# Altium PCB DSPboard.PCBDOC (part 1 of 2)
Units mil, origin at the board's own origin, x right, y up, seen from the top; angles counter-clockwise.
Board outline 6250 x 3000 mil, 4 copper layers (Top Layer, Internal Plane 1, Internal Plane 2, Bottom Layer); 133 components, 118 nets, 891 pads, 424 vias.
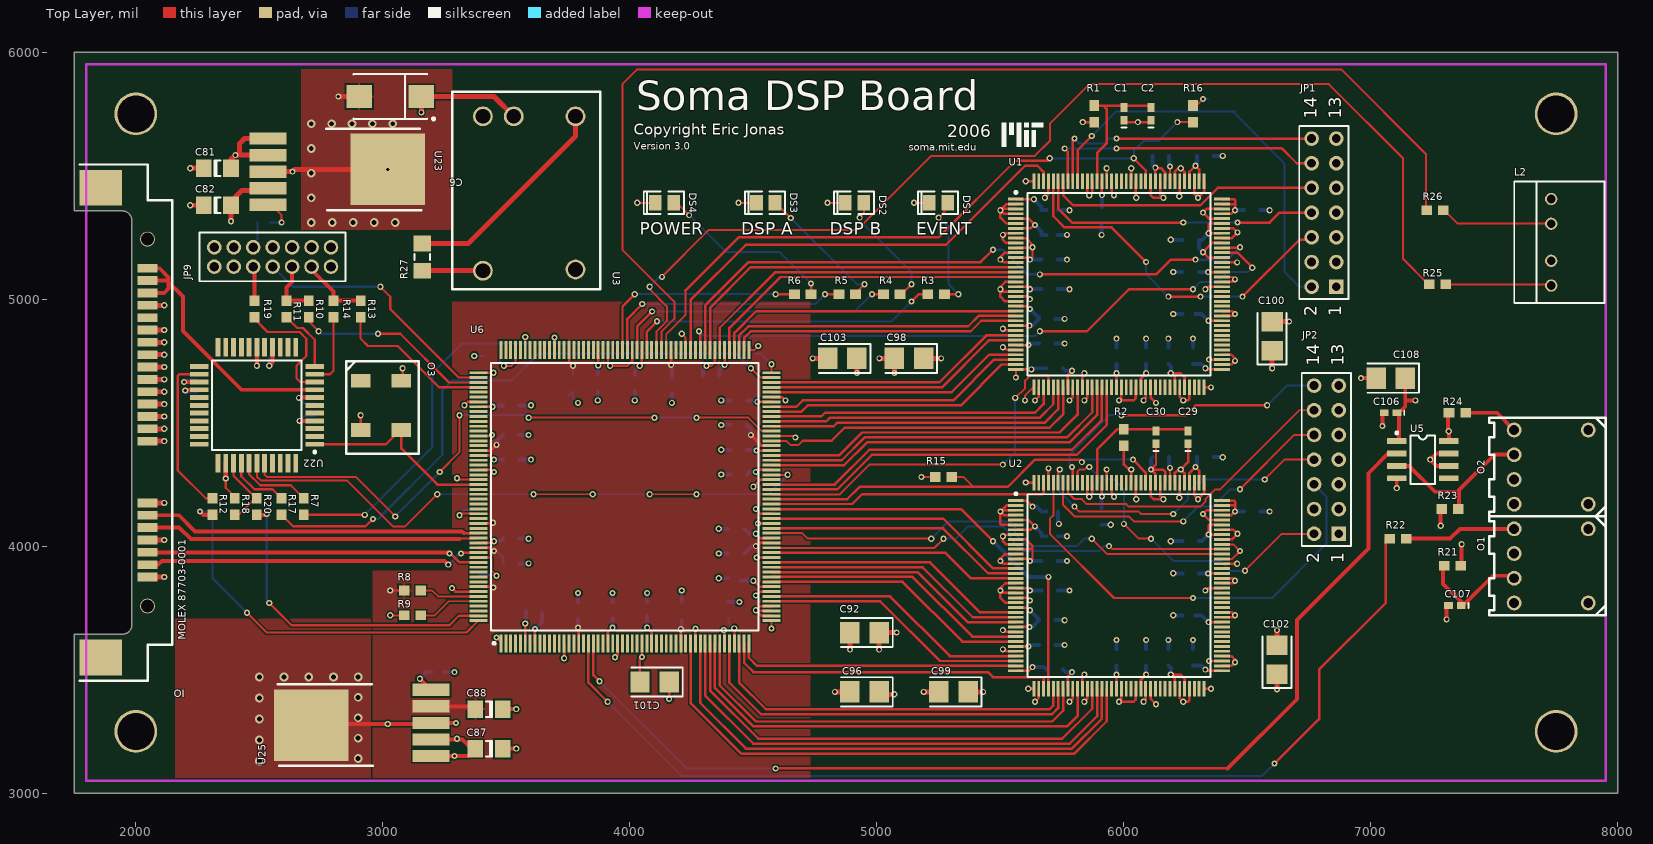
[diagram p0: Top Layer view]
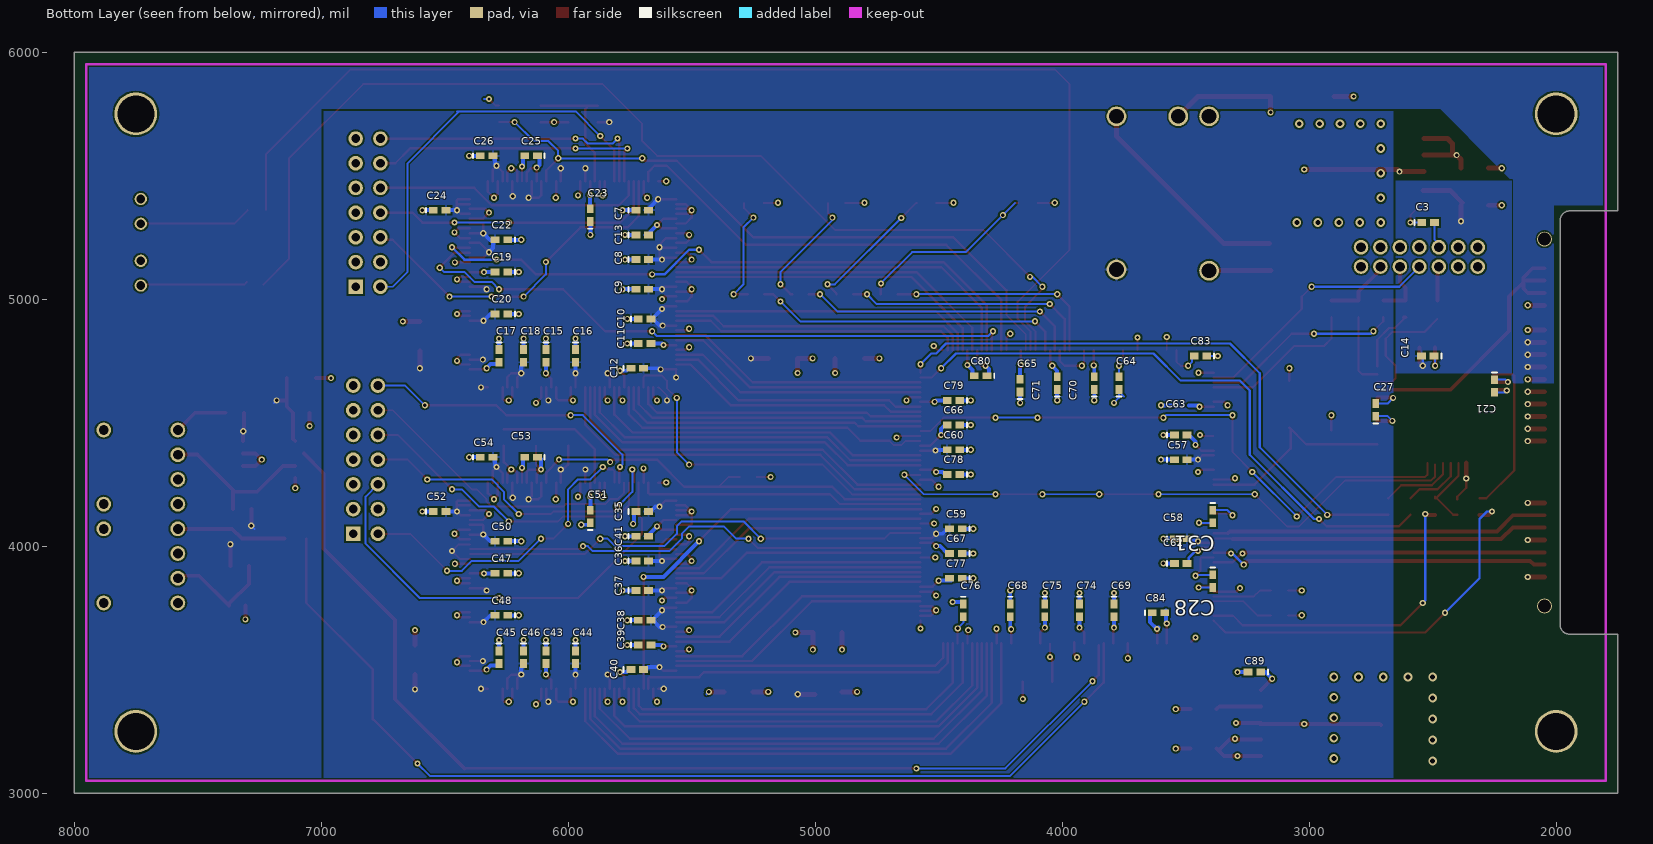
[diagram p1: Bottom Layer view, seen from below]
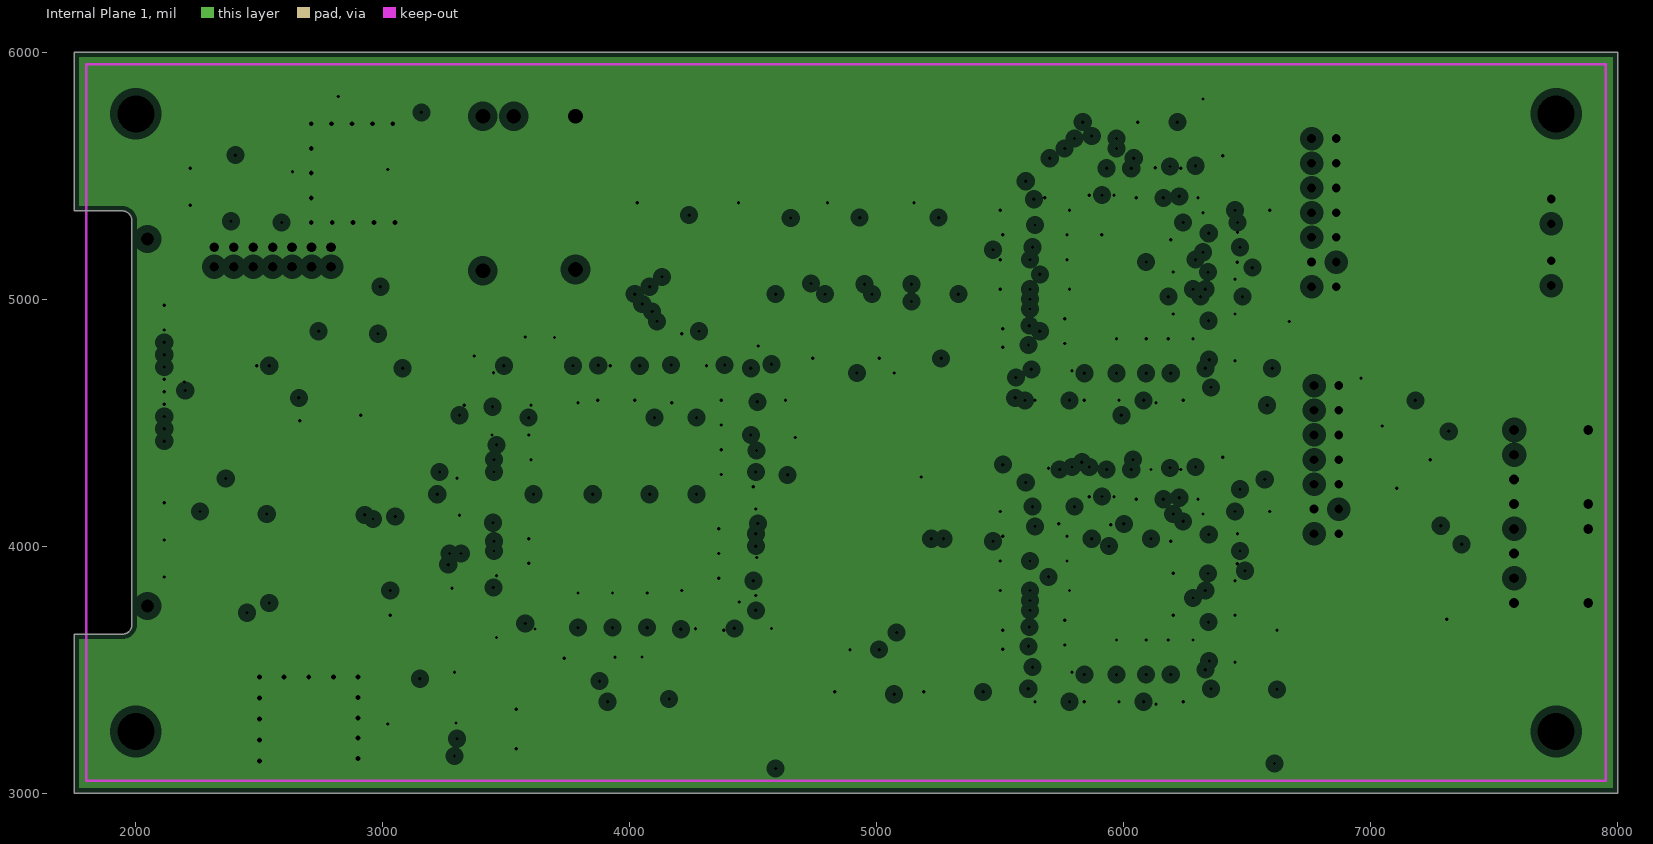
[diagram p2: Internal Plane 1, clearances drawn from the general rule]
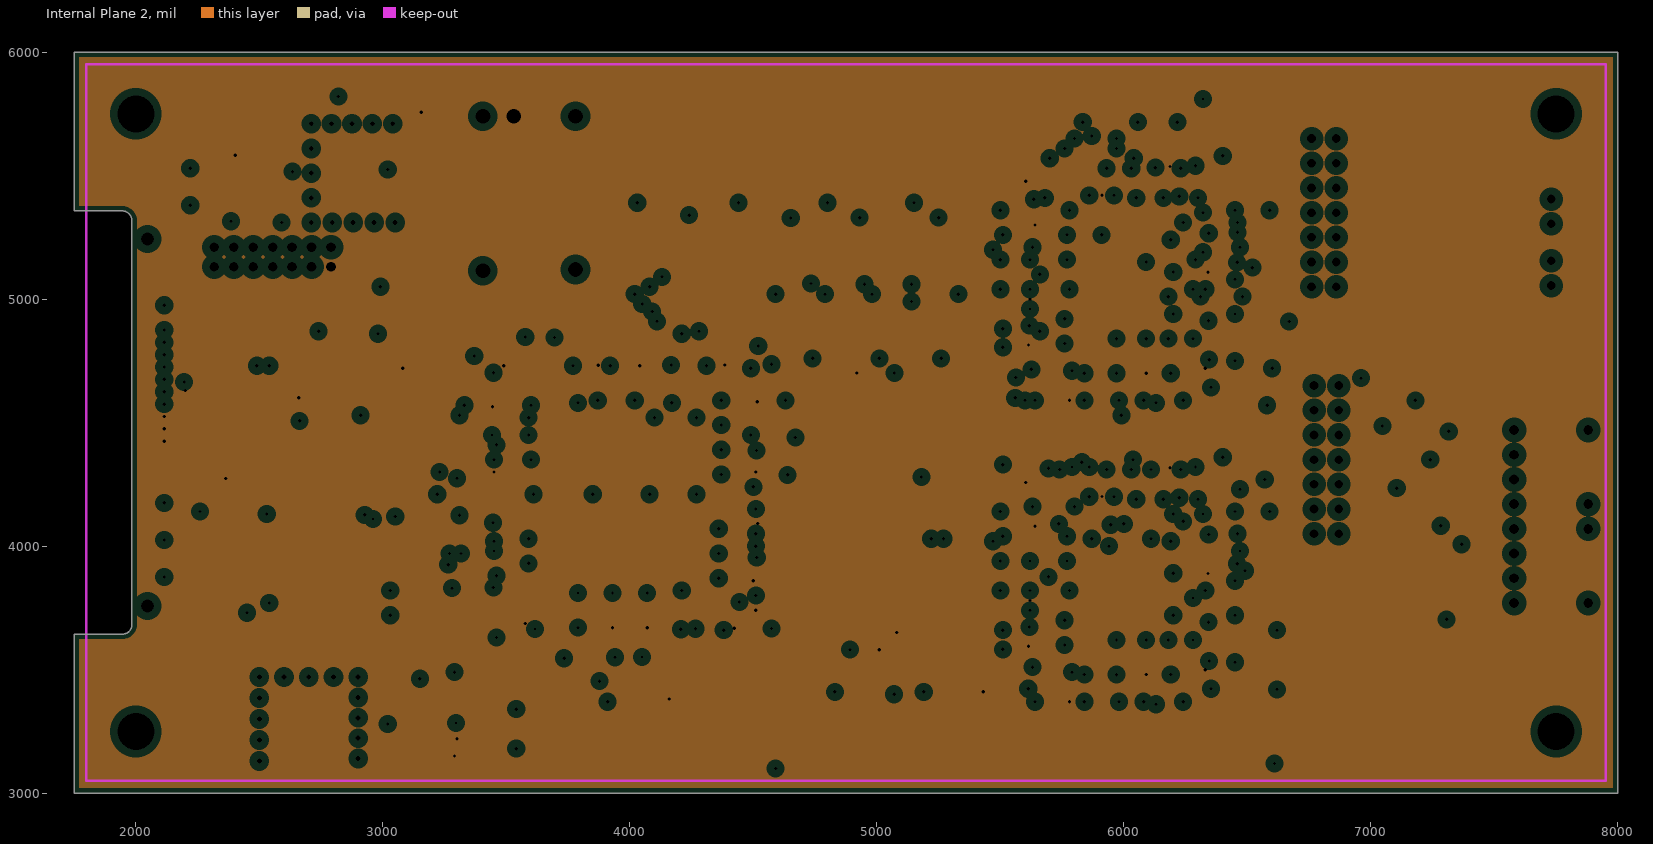
[diagram p3: Internal Plane 2, clearances drawn from the general rule]

## Layer stack, top to bottom
Top Layer: signal copper 1.4
Dielectric: core 12.6, FR-4, Dk 4.8
Internal Plane 1: plane copper 1.4, net GND
Dielectric: prepreg 12.6, FR-4, Dk 4.8
Internal Plane 2: plane copper 1.4, net VCC
Dielectric: core 12.6, FR-4, Dk 4.8
Bottom Layer: signal copper 1.4

## Board outline
1750,3000 1750,3643.11 1944.88,3643.11 ccw(c1944.88,3682.48) 1984.25,3682.48 1984.25,5317.52 ccw(c1944.88,5317.52) 1944.88,5356.89 1750,5356.89 1750,6000 8000,6000 8000,3000

## Design rules (kind name [scope] priority, off if disabled: settings)
Clearance [All] p1: gap=7
ComponentClearance [All] p1: gap=10 collisioncheckmode=0 verticalgap=10
HoleSize [All] p1: absolutevalues=TRUE maxlimit=200 minlimit=1 maxpercent=80.000 minpercent=20.000
PlaneClearance [All] p1: clearance=30
PlaneConnect [All] p1: planeconnectstyle=Relief reliefexpansion=20 reliefentries=4 reliefconductorwidth=15 reliefairgap=8
PolygonConnect "thermal relief" [(HasFootprint('KTT'))] p1: connectstyle=Direct reliefconductorwidth=10 reliefentries=4 polygonreliefangle="90 Angle"
PolygonConnect [All] p2: connectstyle=Relief reliefconductorwidth=10 reliefentries=4 polygonreliefangle="90 Angle"
RoomDefinition PowerClocks [InComponentClass('PowerClocks')] p1: confinementstyle=ConfineIn formatcopy=TRUE lockcomponents=FALSE outline 2560,5240 3800,5240 3800,5940 2560,5940
RoomDefinition DSPA [InComponentClass('DSPA')] p2: confinementstyle=ConfineIn formatcopy=TRUE lockcomponents=FALSE outline 6710,5680 5290,5680 5290,4470 6710,4470
RoomDefinition FPGA [InComponentClass('FPGA')] p3: confinementstyle=ConfineIn formatcopy=TRUE lockcomponents=FALSE outline 8000,5080 3110,5080 3110,3432 8000,3432
RoomDefinition fiber [InComponentClass('fiber')] p4: confinementstyle=ConfineIn formatcopy=TRUE lockcomponents=FALSE outline 7950,3120 7950,4830 7000,4830 7000,3120
RoutingVias [All] p1: holewidth=13.5 width=25 viastyle="Through Hole" minholewidth=13.5 minwidth=25 maxholewidth=28 maxwidth=50
SolderMaskExpansion [All] p1: expansion=4
TestPointUsage [All] p1: valid=0 allowmultiple=FALSE
Testpoint [All] p1: side=15 testpointundercomponent=TRUE minsize=40 maxsize=100 preferedsize=60 minholesize=0 maxholesize=40 preferedholesize=32 testpointgrid=1 style=1023 order=0-112345678
Width [All] p1: maxlimit=200 minlimit=7 preferedwidth=7 toplayer_prefwidth=10 bottomlayer_prefwidth=9 minimp=50.000000 maximp=50.000000 favimp=50.000000
14 further rules are at their usual default settings.

## Classes and differential pairs
component class DSPA: C1 C2 C7 C8 C9 C10 C11 C12 C13 C15 C16 C17 C18 C19 C20 C22 C23 C24 C25 C26 C29 C30 C35 C36 C37 C38 C39 C40 C41 C43 C44 C45 C46 C47 C48 C50 C51 C52 C53 C54 JP1 JP2 R1 R2 U1 U2
net class FLAGB[0..3]: FLAGB0 FLAGB1 FLAGB2 FLAGB3
net class FLAGA[0..3]: FLAGA0 FLAGA1 FLAGA2 FLAGA3
net class ADB[0..15]: ADB0 ADB1 ADB2 ADB3 ADB4 ADB5 ADB6 ADB7 ADB8 ADB9 ADB10 ADB11 ADB12 ADB13 ADB14 ADB15
net class ADA[0..15]: ADA0 ADA1 ADA2 ADA3 ADA4 ADA5 ADA6 ADA7 ADA8 ADA9 ADA10 ADA11 ADA12 ADA13 ADA14 ADA15
component class fiber: C106 C107 C108 O1 O2 R21 R22 R23 R24 U5
component class FPGA: C83 C84 DS1 DS2 DS3 DS4 IO L2 R3 R4 R5 R6 R7 R8 R9 R15 R16 R17 R18 R20 R25 R26 U6
component class PowerClocks: C3 C6 C14 C21 C27 C28 C31 C57 C58 C59 C60 C62 C63 C64 C65 C66 C67 C68 C69 C70 C71 C74 C75 C76 C77 C78 C79 C80 C81 C82 C87 C88 C89 C92 C96 C98 C99 C100 C101 C102 C103 JP9 O3 R10 R11 R12 R13 R14 R19 R27 U3 U22 U23 U25

## Components (designator, comment, footprint, x,y, rotation, side; value= is the part's Value field where it differs from the comment)
C1 "Cap" CC1005-0402 6000,5750 r90 top
C2 "Cap" CC1005-0402 6110,5750 r90 top
C3 "Cap" CC1005-0402 2518.25,5310 r180 bottom
C6 "A700D107M006AT" TC7343-2917 3030,5820 r180 top
C7 "Cap" CC1005-0402 5700,5360 r180 bottom
C8 "Cap" CC1005-0402 5700,5160 r180 bottom
C9 "Cap" CC1005-0402 5700,5040 r180 bottom
C10 "Cap" CC1005-0402 5690,4920 r180 bottom
C11 "Cap" CC1005-0402 5690,4820 r180 bottom
C12 "Cap" CC1005-0402 5720,4720 r180 bottom
C13 "Cap" CC1005-0402 5700,5260 r180 bottom
C14 "Cap" CC1005-0402 2520,4770 r0 bottom
C15 "Cap" CC1005-0402 6090,4770 r270 bottom
C16 "Cap" CC1005-0402 5970,4770 r270 bottom
C17 "Cap" CC1005-0402 6280,4770 r270 bottom
C18 "Cap" CC1005-0402 6180,4770 r270 bottom
C19 "Cap" CC1005-0402 6270,5110 r0 bottom
C20 "Cap" CC1005-0402 6270,4940 r0 bottom
C21 "Cap" CC1005-0402 2250,4648.25 r270 bottom
C22 "Cap" CC1005-0402 6270,5240 r0 bottom
C23 "Cap" CC1005-0402 5910,5340 r90 bottom
C24 "Cap" CC1005-0402 6520,5360 r180 bottom
C25 "Cap" CC1005-0402 6150,5580 r0 bottom
C26 "Cap" CC1005-0402 6330,5580 r180 bottom
C27 "Cap" CC1005-0402 2730,4551.75 r90 bottom
C28 "Cap" CC1005-0402 3390,3858.25 r270 bottom
C29 "Cap" CC1005-0402 6260,4440 r90 top
C30 "Cap" CC1005-0402 6130,4440 r90 top
C31 "Cap" CC1005-0402 3390,4120 r270 bottom
C35 "Cap" CC1005-0402 5700,4140 r180 bottom
C36 "Cap" CC1005-0402 5700,3940 r180 bottom
C37 "Cap" CC1005-0402 5700,3820 r180 bottom
C38 "Cap" CC1005-0402 5690,3700 r180 bottom
C39 "Cap" CC1005-0402 5690,3600 r180 bottom
C40 "Cap" CC1005-0402 5720,3500 r180 bottom
C41 "Cap" CC1005-0402 5700,4040 r180 bottom
C43 "Cap" CC1005-0402 6090,3550 r270 bottom
C44 "Cap" CC1005-0402 5970,3550 r270 bottom
C45 "Cap" CC1005-0402 6280,3550 r270 bottom
C46 "Cap" CC1005-0402 6180,3550 r270 bottom
C47 "Cap" CC1005-0402 6270,3890 r0 bottom
C48 "Cap" CC1005-0402 6270,3720 r0 bottom
C50 "Cap" CC1005-0402 6270,4020 r0 bottom
C51 "Cap" CC1005-0402 5910,4120 r90 bottom
C52 "Cap" CC1005-0402 6520,4140 r180 bottom
C53 "Cap" CC1005-0402 6150,4360 r0 bottom
C54 "Cap" CC1005-0402 6330,4360 r180 bottom
C57 "Cap" CC1005-0402 3520,4350 r180 bottom
C58 "Cap" CC1005-0402 3520,4030 r180 bottom
C59 "Cap" CC1005-0402 4430,4070 r0 bottom
C60 "Cap" CC1005-0402 4440,4390 r0 bottom
C62 "Cap" CC1005-0402 3520,3930 r180 bottom
C63 "Cap" CC1005-0402 3520,4450 r180 bottom
C64 "Cap" CC1005-0402 3770,4660 r90 bottom
C65 "Cap" CC1005-0402 4170,4650 r90 bottom
C66 "Cap" CC1005-0402 4440,4490 r0 bottom
C67 "Cap" CC1005-0402 4430,3970 r0 bottom
C68 "Cap" CC1005-0402 4210,3740 r270 bottom
C69 "Cap" CC1005-0402 3790,3740 r270 bottom
C70 "Cap" CC1005-0402 3870,4660 r90 bottom
C71 "Cap" CC1005-0402 4020,4660 r90 bottom
C74 "Cap" CC1005-0402 3930,3740 r270 bottom
C75 "Cap" CC1005-0402 4070,3740 r270 bottom
C76 "Cap" CC1005-0402 4400,3740 r270 bottom
C77 "Cap" CC1005-0402 4430,3870 r0 bottom
C78 "Cap" CC1005-0402 4440,4290 r0 bottom
C79 "Cap" CC1005-0402 4440,4590 r0 bottom
C80 "Cap" CC1005-0402 4330,4690 r0 bottom
C81 "10uF" CC3216-1206 2330,5530 r0 top
C82 "10uF" CC3216-1206 2330,5380 r0 top
C83 "Cap" CC1005-0402 3440,4770 r0 bottom
C84 "Cap" CC1005-0402 3610,3730 r180 bottom
C87 "10uF" CC3216-1206 3430,3180 r180 top
C88 "10uF" CC3216-1206 3430,3340 r180 top
C89 "Cap" CC1005-0402 3221.75,3490 r0 bottom
C92 "Bypass Cap" TC3528-1411 4950,3650 r180 top
C96 "Bypass Cap" TC3528-1411 4950,3410 r180 top
C98 "Bypass Cap" TC3528-1411 5130,4760 r180 top
C99 "Bypass Cap" TC3528-1411 5310,3410 r180 top
C100 "Bypass Cap" TC3528-1411 6600,4850 r90 top
C101 "Bypass Cap" TC3528-1411 4100,3450 r180 top
C102 "Bypass Cap" TC3528-1411 6620,3540 r90 top
C103 "Bypass Cap" TC3528-1411 4860,4760 r180 top
C106 "Cap" CC1005-0402 7080,4540 r180 top
C107 "Cap" CC1005-0402 7340,3760 r180 top
C108 "" TC3528-1411 7080,4680 r180 top
DS1 "LED3" "SMD _LED" 5250,5390 r0 top
DS2 "LED3" "SMD _LED" 4910,5390 r0 top
DS3 "LED3" "SMD _LED" 4550,5390 r0 top
DS4 "LED3" "SMD _LED" 4140,5390 r0 top
IO "SATA 23-pin header" "MOLEX 87703-0001" 2047.24,4500 r270 top locked
JP1 "Header 7X2" HDR2X7 6860,5050 r90 top
JP2 "Header 7X2" HDR2X7 6870,4050 r90 top
JP9 "Header 7X2" HDR2x7-2mm 2790,5210 r90 top
L2 "Dual LED" "LUMEX DUAL RT-ANG LED" 7730,5230 r90 top
O1 "HFBR-2528" HPVL 7580,3920 r90 top
O2 "HFBR-1528" HPVL 7580,4320 r90 top
O3 "OSC2" ECS-3953M 2910,4670 r270 top
R1 "Res1" CR1608-0603 5880,5750 r90 top
R2 "Res1" CR1608-0603 6000,4440 r90 top
R3 "Res1" CR1608-0603 5240,5020 r0 top
R4 "Res1" CR1608-0603 5060,5020 r0 top
R5 "Res1" CR1608-0603 4880,5020 r0 top
R6 "Res1" CR1608-0603 4700,5020 r0 top
R7 "Res1" CR1608-0603 2680,4160 r90 top
R8 "DCI termination" CR1608-0603 3120,3820 r0 top
R9 "DCI termination" CR1608-0603 3120,3720 r0 top
R10 "current-limiting series res" CR1608-0603 2700,4960 r270 top
R11 "current-limiting series res" CR1608-0603 2610,4960 r90 top
R12 "current-limiting series res" CR1608-0603 2310,4160 r270 top
R13 "current-limiting series res" CR1608-0603 2910,4960 r90 top
R14 "current-limiting series res" CR1608-0603 2800,4960 r90 top
R15 "RESET pulldown resistor" CR1608-0603 5270,4280 r180 top
R16 "RESET pulldown resistor" CR1608-0603 6280,5750 r270 top
R17 "Res1" CR1608-0603 2590,4160 r90 top
R18 "Limit R" CR1608-0603 2400,4160 r90 top
R19 "current-limiting series res" CR1608-0603 2480,4960 r90 top
R20 "Res1" CR1608-0603 2490,4160 r90 top
R21 "Res1" CR1608-0603 7330,3920 r180 top
R22 "Res1" CR1608-0603 7110,4030 r0 top
R23 "Res1" CR1608-0603 7320,4150 r180 top
R24 "Res1" CR1608-0603 7350,4540 r180 top
R25 "Res1" CR1608-0603 7270,5060 r0 top
R26 "Res1" CR1608-0603 7260,5360 r0 top
R27 "Res1" CR3216-1206 3160,5170 r90 top
U1 "ADSP-21262 DSP" F-QFP20X20-G144/N 5980,5060 r0 top locked
U2 "ADSP-21262 DSP" F-QFP20X20-G144/N 5980,3840 r0 top
U3 "PTH0300WAH" "TI EUS" 3780,5740 r270 top
U5 "SN75451BD" SO-G8/E2.5 7210,4350 r270 top
U6 "XC3S200-PQ208" F-QFP28X28-G208/Z32N 3980,4200 r90 top locked
U22 "Xilinx CoolRunner-II XC2C64A" QFP10x10-G44/G10N 2490,4570 r180 top
U23 "TPS78618 1.8 V" KTT 2510,5650 r270 top
U25 "TPS78625 2.5 V" KTT 3220,3150 r90 top

## Footprints (in the part's own frame and the unit in brackets; to place one, negate y for a bottom-side part, rotate by r counter-clockwise, add the part's x,y. Pads: shape width x height; smd on the part's side, far side on the other; paste and mask are expansions set on the pad)
CC1005-0402 [mm] "Chip Capacitor; Body 1.0 x 0.5 mm (LxW typ)"
  rect 0.9x0.7 smd: 1(-0.65,0) 2(0.65,0)
  silkscreen extent -1.4,-0.25 -1.4,0.25
CC3216-1206 [mm] "Chip Capacitor; Body 3.2 x 1.6 mm (LxW typ)"
  rect 1.6x1.8 smd: 1(-1.4,0) 2(1.4,0)
  silkscreen extent -0.3,-0.8 0.3,0.8
CR1608-0603 [mm] "Chip Resistor; Body 1.6 x 0.8 mm (LxW typ)"
  rect 1.1x1 smd: 1(-0.85,0) 2(0.85,0)
CR3216-1206 [mm] "Chip Resistor; Body 3.2 x 1.6 mm (LxW typ)"
  rect 1.6x1.8 smd: 1(-1.4,0) 2(1.4,0)
  silkscreen extent -0.3,-0.8 0.3,0.8
ECS-3953M [mm] "ECS SMD CLOCK OSCILLATOR"
  rect 1.4x2 smd: 1(0,0) 2(5.08,0) 3(5.08,4.2) 4(0,4.2)
  silkscreen extent -2,-1.5 7.5,6
F-QFP20X20-G144/N [mm]
  rect 1.6x0.3 smd: 1(-10.6,8.75) 2(-10.6,8.25) 3(-10.6,7.75) 4(-10.6,7.25) 5(-10.6,6.75) 6(-10.6,6.25) 7(-10.6,5.75) 8(-10.6,5.25) 9(-10.6,4.75) 10(-10.6,4.25) 11(-10.6,3.75) 12(-10.6,3.25) 13(-10.6,2.75) 14(-10.6,2.25) 15(-10.6,1.75) 16(-10.6,1.25) 17(-10.6,0.75) 18(-10.6,0.25) 19(-10.6,-0.25) 20(-10.6,-0.75) 21(-10.6,-1.25) 22(-10.6,-1.75) 23(-10.6,-2.25) 24(-10.6,-2.75) 25(-10.6,-3.25) 26(-10.6,-3.75) 27(-10.6,-4.25) 28(-10.6,-4.75) 29(-10.6,-5.25) 30(-10.6,-5.75) 31(-10.6,-6.25) 32(-10.6,-6.75) 33(-10.6,-7.25) 34(-10.6,-7.75) 35(-10.6,-8.25) 36(-10.6,-8.75) 73(10.6,-8.75) 74(10.6,-8.25) 75(10.6,-7.75) 76(10.6,-7.25) 77(10.6,-6.75) 78(10.6,-6.25) 79(10.6,-5.75) 80(10.6,-5.25) 81(10.6,-4.75) 82(10.6,-4.25) 83(10.6,-3.75) 84(10.6,-3.25) 85(10.6,-2.75) 86(10.6,-2.25) 87(10.6,-1.75) 88(10.6,-1.25) 89(10.6,-0.75) 90(10.6,-0.25) 91(10.6,0.25) 92(10.6,0.75) 93(10.6,1.25) 94(10.6,1.75) 95(10.6,2.25) 96(10.6,2.75) 97(10.6,3.25) 98(10.6,3.75) 99(10.6,4.25) 100(10.6,4.75) 101(10.6,5.25) 102(10.6,5.75) 103(10.6,6.25) 104(10.6,6.75) 105(10.6,7.25) 106(10.6,7.75) 107(10.6,8.25) 108(10.6,8.75)
  rect 0.3x1.6 smd: 37(-8.75,-10.6) 38(-8.25,-10.6) 39(-7.75,-10.6) 40(-7.25,-10.6) 41(-6.75,-10.6) 42(-6.25,-10.6) 43(-5.75,-10.6) 44(-5.25,-10.6) 45(-4.75,-10.6) 46(-4.25,-10.6) 47(-3.75,-10.6) 48(-3.25,-10.6) 49(-2.75,-10.6) 50(-2.25,-10.6) 51(-1.75,-10.6) 52(-1.25,-10.6) 53(-0.75,-10.6) 54(-0.25,-10.6) 55(0.25,-10.6) 56(0.75,-10.6) 57(1.25,-10.6) 58(1.75,-10.6) 59(2.25,-10.6) 60(2.75,-10.6) 61(3.25,-10.6) 62(3.75,-10.6) 63(4.25,-10.6) 64(4.75,-10.6) 65(5.25,-10.6) 66(5.75,-10.6) 67(6.25,-10.6) 68(6.75,-10.6) 69(7.25,-10.6) 70(7.75,-10.6) 71(8.25,-10.6) 72(8.75,-10.6) 109(8.75,10.6) 110(8.25,10.6) 111(7.75,10.6) 112(7.25,10.6) 113(6.75,10.6) 114(6.25,10.6) 115(5.75,10.6) 116(5.25,10.6) 117(4.75,10.6) 118(4.25,10.6) 119(3.75,10.6) 120(3.25,10.6) 121(2.75,10.6) 122(2.25,10.6) 123(1.75,10.6) 124(1.25,10.6) 125(0.75,10.6) 126(0.25,10.6) 127(-0.25,10.6) 128(-0.75,10.6) 129(-1.25,10.6) 130(-1.75,10.6) 131(-2.25,10.6) 132(-2.75,10.6) 133(-3.25,10.6) 134(-3.75,10.6) 135(-4.25,10.6) 136(-4.75,10.6) 137(-5.25,10.6) 138(-5.75,10.6) 139(-6.25,10.6) 140(-6.75,10.6) 141(-7.25,10.6) 142(-7.75,10.6) 143(-8.25,10.6) 144(-8.75,10.6)
  silkscreen extent -10.72,-9.4 9.4,9.57
F-QFP28X28-G208/Z32N [mm]
  rect 1.85x0.3 smd: 1(-15.075,12.75) 2(-15.075,12.25) 3(-15.075,11.75) 4(-15.075,11.25) 5(-15.075,10.75) 6(-15.075,10.25) 7(-15.075,9.75) 8(-15.075,9.25) 9(-15.075,8.75) 10(-15.075,8.25) 11(-15.075,7.75) 12(-15.075,7.25) 13(-15.075,6.75) 14(-15.075,6.25) 15(-15.075,5.75) 16(-15.075,5.25) 17(-15.075,4.75) 18(-15.075,4.25) 19(-15.075,3.75) 20(-15.075,3.25) 21(-15.075,2.75) 22(-15.075,2.25) 23(-15.075,1.75) 24(-15.075,1.25) 25(-15.075,0.75) 26(-15.075,0.25) 27(-15.075,-0.25) 28(-15.075,-0.75) 29(-15.075,-1.25) 30(-15.075,-1.75) 31(-15.075,-2.25) 32(-15.075,-2.75) 33(-15.075,-3.25) 34(-15.075,-3.75) 35(-15.075,-4.25) 36(-15.075,-4.75) 37(-15.075,-5.25) 38(-15.075,-5.75) 39(-15.075,-6.25) 40(-15.075,-6.75) 41(-15.075,-7.25) 42(-15.075,-7.75) 43(-15.075,-8.25) 44(-15.075,-8.75) 45(-15.075,-9.25) 46(-15.075,-9.75) 47(-15.075,-10.25) 48(-15.075,-10.75) 49(-15.075,-11.25) 50(-15.075,-11.75) 51(-15.075,-12.25) 52(-15.075,-12.75) 105(15.075,-12.75) 106(15.075,-12.25) 107(15.075,-11.75) 108(15.075,-11.25) 109(15.075,-10.75) 110(15.075,-10.25) 111(15.075,-9.75) 112(15.075,-9.25) 113(15.075,-8.75) 114(15.075,-8.25) 115(15.075,-7.75) 116(15.075,-7.25) 117(15.075,-6.75) 118(15.075,-6.25) 119(15.075,-5.75) 120(15.075,-5.25) 121(15.075,-4.75) 122(15.075,-4.25) 123(15.075,-3.75) 124(15.075,-3.25) 125(15.075,-2.75) 126(15.075,-2.25) 127(15.075,-1.75) 128(15.075,-1.25) 129(15.075,-0.75) 130(15.075,-0.25) 131(15.075,0.25) 132(15.075,0.75) 133(15.075,1.25) 134(15.075,1.75) 135(15.075,2.25) 136(15.075,2.75) 137(15.075,3.25) 138(15.075,3.75) 139(15.075,4.25) 140(15.075,4.75) 141(15.075,5.25) 142(15.075,5.75) 143(15.075,6.25) 144(15.075,6.75) 145(15.075,7.25) 146(15.075,7.75) 147(15.075,8.25) 148(15.075,8.75) 149(15.075,9.25) 150(15.075,9.75) 151(15.075,10.25) 152(15.075,10.75) 153(15.075,11.25) 154(15.075,11.75) 155(15.075,12.25) 156(15.075,12.75)
  rect 0.3x1.85 smd: 53(-12.75,-15.075) 54(-12.25,-15.075) 55(-11.75,-15.075) 56(-11.25,-15.075) 57(-10.75,-15.075) 58(-10.25,-15.075) 59(-9.75,-15.075) 60(-9.25,-15.075) 61(-8.75,-15.075) 62(-8.25,-15.075) 63(-7.75,-15.075) 64(-7.25,-15.075) 65(-6.75,-15.075) 66(-6.25,-15.075) 67(-5.75,-15.075) 68(-5.25,-15.075) 69(-4.75,-15.075) 70(-4.25,-15.075) 71(-3.75,-15.075) 72(-3.25,-15.075) 73(-2.75,-15.075) 74(-2.25,-15.075) 75(-1.75,-15.075) 76(-1.25,-15.075) 77(-0.75,-15.075) 78(-0.25,-15.075) 79(0.25,-15.075) 80(0.75,-15.075) 81(1.25,-15.075) 82(1.75,-15.075) 83(2.25,-15.075) 84(2.75,-15.075) 85(3.25,-15.075) 86(3.75,-15.075) 87(4.25,-15.075) 88(4.75,-15.075) 89(5.25,-15.075) 90(5.75,-15.075) 91(6.25,-15.075) 92(6.75,-15.075) 93(7.25,-15.075) 94(7.75,-15.075) 95(8.25,-15.075) 96(8.75,-15.075) 97(9.25,-15.075) 98(9.75,-15.075) 99(10.25,-15.075) 100(10.75,-15.075) 101(11.25,-15.075) 102(11.75,-15.075) 103(12.25,-15.075) 104(12.75,-15.075) 157(12.75,15.075) 158(12.25,15.075) 159(11.75,15.075) 160(11.25,15.075) 161(10.75,15.075) 162(10.25,15.075) 163(9.75,15.075) 164(9.25,15.075) 165(8.75,15.075) 166(8.25,15.075) 167(7.75,15.075) 168(7.25,15.075) 169(6.75,15.075) 170(6.25,15.075) 171(5.75,15.075) 172(5.25,15.075) 173(4.75,15.075) 174(4.25,15.075) 175(3.75,15.075) 176(3.25,15.075) 177(2.75,15.075) 178(2.25,15.075) 179(1.75,15.075) 180(1.25,15.075) 181(0.75,15.075) 182(0.25,15.075) 183(-0.25,15.075) 184(-0.75,15.075) 185(-1.25,15.075) 186(-1.75,15.075) 187(-2.25,15.075) 188(-2.75,15.075) 189(-3.25,15.075) 190(-3.75,15.075) 191(-4.25,15.075) 192(-4.75,15.075) 193(-5.25,15.075) 194(-5.75,15.075) 195(-6.25,15.075) 196(-6.75,15.075) 197(-7.25,15.075) 198(-7.75,15.075) 199(-8.25,15.075) 200(-8.75,15.075) 201(-9.25,15.075) 202(-9.75,15.075) 203(-10.25,15.075) 204(-10.75,15.075) 205(-11.25,15.075) 206(-11.75,15.075) 207(-12.25,15.075) 208(-12.75,15.075)
  silkscreen extent -15.2,-13.75 13.75,13.75
HDR2X7 [mm]
  rect 1.5x1.5 hole 0.9: 1(0,0)
  round 1.5 hole 0.9: 2(0,2.54) 3(2.54,0) 4(2.54,2.54) 5(5.08,0) 6(5.08,2.54) 7(7.62,0) 8(7.62,2.54) 9(10.16,0) 10(10.16,2.54) 11(12.7,0) 12(12.7,2.54) 13(15.24,0) 14(15.24,2.54)
  silkscreen extent -1.27,-1.27 16.51,3.81
HDR2x7-2mm [mm]
  round 1.5 hole 1: 1(0,0) 2(-2,0) 3(0,2) 4(-2,2) 5(0,4) 6(-2,4) 7(0,6) 8(-2,6) 9(0,8) 10(-2,8) 11(0,10) 12(-2,10) 13(0,12) 14(-2,12)
  silkscreen extent -3.5,-1.5 1.5,13.5
HPVL [mil]
  round 60 hole 40: 1(150,0) 2(50,0) 3(-50,0) 4(-150,0) 5(-150,-300) 8(150,-300)
  silkscreen extent -200,-370 200,100
KTT [mil] "TI DDPAK-5"
  rect 50x150 smd: 1(0,25) 2(67,25) 3(134,25) 4(201,25) 5(268,25)
  rect 290x300 smd: 3(125,510)
  silkscreen extent -40,260 290,645
"LUMEX DUAL RT-ANG LED" [mil] "Lumex Dual Right-angle LED holder for part SSF-LXH2100XX"
  round 50 hole 35: 1(-175.2,0) 2(-75,0) 3(75,0) 4(175.2,0)
  silkscreen extent -246,-217 246,150
"MOLEX 87703-0001" [mm] "Molex 1.27mm pitch SATA device plug, 2.5\" drive, without jumper, 22 circuits"
  rect 3.66x4.4 smd: 0(-24.15,-4.8) 0(24.15,-4.8)
  round 1.524 hole 1.346: 0(-18.865,0) 0(18.865,0)
  rect 0.9x2.1 smd: 1(15.875,0) 2(14.605,0) 3(13.335,0) 4(12.065,0) 5(10.795,0) 6(9.525,0) 7(8.255,0) P1(1.905,0) P2(0.635,0) P3(-0.635,0) P4(-1.905,0) P5(-3.175,0) P6(-4.445,0) P7(-5.715,0) P8(-6.985,0) P9(-8.255,0) P10(-9.525,0) P11(-10.795,0) P12(-12.065,0) P13(-13.335,0) P14(-14.605,0) P15(-15.875,0)
  silkscreen extent -26.54,-6.99 26.54,2.54
QFP10x10-G44/G10N [mm] "QFP, Metric; 44 Leads; Body 10 x 10 mm; Pitch 0.8 mm"
  rect 1.9x0.5 smd: 1(-5.95,4) 2(-5.95,3.2) 3(-5.95,2.4) 4(-5.95,1.6) 5(-5.95,0.8) 6(-5.95,0) 7(-5.95,-0.8) 8(-5.95,-1.6) 9(-5.95,-2.4) 10(-5.95,-3.2) 11(-5.95,-4) 23(5.95,-4) 24(5.95,-3.2) 25(5.95,-2.4) 26(5.95,-1.6) 27(5.95,-0.8) 28(5.95,0) 29(5.95,0.8) 30(5.95,1.6) 31(5.95,2.4) 32(5.95,3.2) 33(5.95,4)
  rect 0.5x1.9 smd: 12(-4,-5.95) 13(-3.2,-5.95) 14(-2.4,-5.95) 15(-1.6,-5.95) 16(-0.8,-5.95) 17(0,-5.95) 18(0.8,-5.95) 19(1.6,-5.95) 20(2.4,-5.95) 21(3.2,-5.95) 22(4,-5.95) 34(4,5.95) 35(3.2,5.95) 36(2.4,5.95) 37(1.6,5.95) 38(0.8,5.95) 39(0,5.95) 40(-0.8,5.95) 41(-1.6,5.95) 42(-2.4,5.95) 43(-3.2,5.95) 44(-4,5.95)
  silkscreen extent -6.08,-4.6 4.6,4.92
"SMD _LED" [mm] "SMT LED; 2 Leads"
  rect 1.3x1.6 smd: 1(0.95,0) 2(-0.95,0)
  silkscreen extent -2.13,-1.15 2,1.15
SO-G8/E2.5 [mm]
  rect 0.6x2.05 smd: 1(-1.905,-2.675) 2(-0.635,-2.675) 3(0.635,-2.675) 4(1.905,-2.675) 5(1.905,2.675) 6(0.635,2.675) 7(-0.635,2.675) 8(-1.905,2.675)
  silkscreen extent -2.88,-2.8 2.5,1.25
TC3528-1411 [mm]
  rect 2x2.2 smd: 1(-1.5,0) 2(1.5,0)
  silkscreen extent -2.9,-1.5 2.4,1.5
TC7343-2917 [mm] "Capacitor, SM Tantalum; Body 7.3 x 4.3 mm (LxW typ)"
  rect 2.6x2.4 smd: 1(-3.2,0) 2(3.2,0)
  silkscreen extent -4.58,-2.3 3.8,2.42
"TI EUS" [mil] "Package for TI PTH03000W"
  round 80 hole 60: 1(0,0) 2(0,-250) 3(0,-375) 4(625,-375) 5(620,0)
  silkscreen extent -100,-500 700,100

## Part data
C1 C2 C3 C7 C8 C9 C10 C11 C12 C13 C14 C15 C16 C17 C18 C19 C20 C21 C22 C23 C24 C25 C26 C27 C28 C29 C30 C31 C35 C36 C37 C38 C39 C40 C41 C43 C44 C45 C46 C47 C48 C50 C51 C52 C53 C54 C57 C58 C59 C60 C62 C63 C64 C65 C66 C67 C68 C69 C70 C71 C74 C75 C76 C77 C78 C79 C80 C83 C84 C89 C106 C107: "Capacitor"
C6: library part "Cap Pol1", "Polarized Capacitor (Radial)"
C81 C82 C87 C88: library part Cap, "Capacitor"
C92 C96 C98 C99 C100 C101 C102 C103: library part "Cap Pol3", "Tantalum Bypass cap"
C108: library part Cap2, "Capacitor"
DS1 DS2 DS3 DS4: "Typical BLUE SiC LED"
IO: library part SATA-23
JP1 JP2 JP9: "Header, 7-Pin, Dual row"
L2: library part "DUAL LED", "DUAL LED"
O1: "Low-cost fiber receiver"
O2: "Low-cost fiber transmitter"
O3: "ECS SMD Oscillator, ECS-3953M"
R1 R2 R3 R4 R5 R6 R7 R17 R20 R21 R22 R23 R24 R25 R26 R27: "Resistor"
R8 R9 R10 R11 R12 R13 R14 R15 R16 R18 R19: library part Res1, "Resistor"
U1 U2: library part ADSP-21262, "SHARC 200 MHz 32-bit floating-point SIMD DSP"
U3: library part PTH03000
U5: "Dual Peripheral Driver"
U6: library part XC3S-PQ208, "Xilinx Spartan-3 PQ208"
U22: library part XC2C64A-5VQ44C
U23 U25: library part TPS786XX, "TI 1.5A LDO"

## Free pads (board coordinates)
  round 173.23 hole 149.61: 4(2000,3250) 4(2000,5750) 4(7750,3250) 4(7750,5750)

## Via types
v1: diameter 25, hole 13.5, Top Layer to Bottom Layer, 398 vias
v2: diameter 35, hole 20, Top Layer to Bottom Layer, 26 vias

## Nets (pads, with @x,y where several pads share a name; then routed paths per layer and width w, separated by ;. In a path a pad name is that pad's centre, name@x,y a point inside that pad or via, vN(x,y) a via of type N, cw(c..) or ccw(c..) an arc to the next point about the centre after c; other vN are vias at no path point)
+1.2VCC: C7.2 C8.2 C9.2 C10.2 C12.2 C16.2 C18.2 C20.2 C22.2 C24.2 C26.2 C35.2 C36.2 C37.2 C38.2 C40.2 C44.2 C46.2 C48.2 C50.2 C52.2 C54.2 C57.2 C58.2 C59.2 C60.2 C96.1 C98.1 C100.1 C102.1 R1.1 R2.1 U1.1 U1.9 U1.11 U1.13 U1.19 U1.23 U1.27 U1.36 U1.37 U1.47 U1.54 U1.60 U1.66 U1.68 U1.72 U1.75 U1.83 U1.90 U1.96 U1.99 U1.101 U1.103 U1.105 U1.107 U1.108 U1.110 U1.112 U1.114 U1.118 U1.120 U1.124 U1.129 U2.1 U2.9 U2.11 U2.13 U2.19 U2.23 U2.27 U2.36 U2.37 U2.47 U2.54 U2.60 U2.66 U2.68 U2.72 U2.75 U2.83 U2.90 U2.96 U2.99 U2.101 U2.103 U2.105 U2.107 U2.108 U2.110 U2.112 U2.114 U2.118 U2.120 U2.124 U2.129 U3.5 U6.70 U6.88 U6.174 U6.192 | length 6565.9
  Top Layer w8: v1(5562.68,4682.68) U1.36@5562.68,4715.51 ; v1(5600,4590) 5600,4610 5632.68,4642.68 U1.37@5635.51,4642.68 ; U2.96@6397.32,3948.27 6438.27,3948.27 v1(6470,3980) 6442.68,4007.32 U2.99@6397.32,4007.32
  Top Layer w10: U6.192@3386.5,4012.99 3442.99,4012.99 v1(3450,4020) ; U6.174@3386.5,4367.32 3432.68,4367.32 v1(3450,4350) ; v1(4510,4050) 4527.32,4032.68 U6.70@4573.5,4032.68 ; v1(4512.99,4387.01) U6.88@4573.5,4387.01 ; U2.36@5562.68,3495.51 5615.51,3495.51 v1(5630,3510) ; U2.27@5562.68,3672.68 v1(5617.32,3672.68) ; U2.23@5562.68,3751.42 5608.58,3751.42 v1(5620,3740) ; U2.19@5562.68,3830.16 5609.84,3830.16 v1(5620,3820) ; U2.13@5562.68,3948.27 5611.73,3948.27 v1(5620,3940) 5630,3950 5630,4000 5602.99,4027.01 U2.9@5562.68,4027.01 ; U2.11@5562.68,3987.64 5617.64,3987.64 5620,3990 5630,3990 ; U2.1@5562.68,4184.49 5605.51,4184.49 v1(5630,4160) ; U1.36@5562.68,4715.51 v1(5625.51,4715.51) ; U1.27@5562.68,4892.68 v1(5617.32,4892.68) ; U1.23@5562.68,4971.42 5608.58,4971.42 v1(5620,4960) ; U1.19@5562.68,5050.16 5609.84,5050.16 v1(5620,5040) ; U1.13@5562.68,5168.27 5611.73,5168.27 v1(5620,5160) 5630,5170 5630,5220 5602.99,5247.01 U1.9@5562.68,5247.01 ; U1.11@5562.68,5207.64 5617.64,5207.64 v1@5620,5210 ; U1.1@5562.68,5404.49 v1(5635.51,5404.49) ; v1(5612.68,3422.68) U2.37@5635.51,3422.68 ; v1@5620,3830 v1@5630,3820 ; v1@5620,5050 v1@5630,5040 ; U2.47@5832.36,3422.68 5832.36,3472.36 v1(5840,3480) ; U1.47@5832.36,4642.68 5832.36,4692.36 v1(5840,4700) ; v1(5833.46,5716.54) R1.1@5880,5716.54 ; v1(5930,4310) 5930.79,4309.21 U2.129@5930.79,4257.32 ; v1(5930,5530) 5930.79,5529.21 U1.129@5930.79,5477.32 ; U2.54@5970.16,3422.68 v1(5970.16,3479.84) ; U1.54@5970.16,4642.68 v1(5970.16,4699.84) ; R2.1@6000,4406.54 6000,4330 6020,4310 v1(6030,4310) 6029.21,4309.21 U2.124@6029.21,4257.32 ; U1.124@6029.21,5477.32 6029.21,5529.21 v1(6030,5530) ; v1(6080,3370) 6088.27,3378.27 U2.60@6088.27,3422.68 ; v1(6080,4590) 6088.27,4598.27 U1.60@6088.27,4642.68 ; U2.120@6107.95,4257.32 6107.95,4202.05 6120,4190 v1(6160,4190) 6147.32,4202.68 U2.118@6147.32,4257.32 ; U1.120@6107.95,5477.32 6107.95,5422.05 6120,5410 v1(6160,5410) 6147.32,5422.68 U1.118@6147.32,5477.32 ; U2.66@6206.38,3422.68 6206.38,3463.62 v1(6190,3480) 6230,3480 6245.75,3464.25 U2.68@6245.75,3422.68 ; U1.66@6206.38,4642.68 6206.38,4683.62 v1(6190,4700) 6230,4700 6245.75,4684.25 U1.68@6245.75,4642.68 ; v1(6223.94,4196.06) 6226.06,4196.06 U2.114@6226.06,4257.32 ; v1(6223.94,5416.06) 6226.06,5416.06 U1.114@6226.06,5477.32 ; U2.112@6265.43,4257.32 6265.43,4295.43 v1(6290,4320) 6304.8,4305.2 U2.110@6304.8,4257.32 ; U1.112@6265.43,5477.32 6265.43,5515.43 v1(6290,5540) 6304.8,5525.2 U1.110@6304.8,5477.32 ; U2.72@6324.49,3422.68 v1(6352.68,3422.68) ; U1.72@6324.49,4642.68 v1(6352.68,4642.68) ; v1(6330,3820) 6340.16,3830.16 U2.90@6397.32,3830.16 ; v1(6330,5040) 6340.16,5050.16 U1.90@6397.32,5050.16 ; v1(6342.36,3692.36) U2.83@6397.32,3692.36 ; v1(6342.36,4912.36) U1.83@6397.32,4912.36 ; v1(6345.12,3534.88) U2.75@6397.32,3534.88 ; v1(6345.12,4754.88) U1.75@6397.32,4754.88 ; U2.101@6397.32,4046.69 v1(6343.31,4046.69) 6343.31,4083.31 6346.06,4086.06 U2.103@6397.32,4086.06 ; U2.105@6397.32,4125.43 6435.43,4125.43 v1(6450,4140) 6450,4180 6445.51,4184.49 U2.108@6397.32,4184.49 ; U2.107@6397.32,4164.8 6445.2,4164.8 6450,4160 ; U1.96@6397.32,5168.27 6341.73,5168.27 v1(6320,5190) 6357.32,5227.32 U1.99@6397.32,5227.32 ; U1.101@6397.32,5266.69 v1(6343.31,5266.69) 6343.31,5303.31 6346.06,5306.06 U1.103@6397.32,5306.06 ; U1.105@6397.32,5345.43 6435.43,5345.43 v1(6450,5360) 6450,5400 6445.51,5404.49 U1.108@6397.32,5404.49 ; U1.107@6397.32,5384.8 6445.2,5384.8 6450,5380
  Top Layer w20: C96.1@5000,3400 v1(5070,3400) ; C98.1@5189.06,4760 v1(5260,4760) ; v1(6600,4720) C100.1@6600,4790.94 ; v1(6620,3420) C102.1@6620,3480.94
  Bottom Layer w16: v1(3450,4020) 3476.54,4020 C58.2@3486.54,4030 ; v1(3450,4350) C57.2@3486.54,4350 ; C59.2@4463.46,4070 4483.46,4050 v1(4510,4050) ; C60.2@4473.46,4390 4510,4390 v1(4512.99,4387.01) ; v1(5617.32,3672.68) 5629.21,3672.68 5656.54,3700 5656.54,3703.46 v1(5620,3740) ; v1(5617.32,4892.68) 5629.21,4892.68 5656.54,4920 5656.54,4923.46 v1(5620,4960) ; v1(5620,3940) C36.2@5666.54,3940 ; v1(5620,5160) C8.2@5666.54,5160 ; v1(5625.51,4715.51) 5630,4720 C12.2@5686.54,4720 ; v1(5630,3510) 5676.54,3510 C40.2@5686.54,3500 ; v1@5630,3820 C37.2@5666.54,3820 ; v1(5630,4160) 5646.54,4160 C35.2@5666.54,4140 ; v1@5630,5040 C9.2@5666.54,5040 ; v1(5635.51,5404.49) 5666.54,5373.46 C7.2@5666.54,5360 ; C35.2@5680,4140 C35.2@5686.54,4140 ; C7.2@5680,5360 C7.2@5686.54,5360 ; C44.2@5970,3516.54 5970,3480 v1(5970.16,3479.84) ; C16.2@5970,4736.54 5970,4700 v1(5970.16,4699.84) ; C46.2@6180,3516.54 6190,3506.54 v1(6190,3480) ; C18.2@6180,4736.54 6190,4726.54 v1(6190,4700) ; C48.2@6290,3720 6314.72,3720 v1(6342.36,3692.36) ; v1(6290,4320) 6296.54,4326.54 C54.2@6296.54,4360 ; C20.2@6290,4940 6314.72,4940 v1(6342.36,4912.36) ; v1(6290,5540) 6296.54,5546.54 C26.2@6296.54,5580 ; C50.2@6303.46,4020 6316.61,4020 v1(6343.31,4046.69) ; v1(6320,5190) 6303.46,5206.54 6303.46,5240 6316.61,5240 v1(6343.31,5266.69) ; v1(6450,4140) C52.2@6486.54,4140 ; v1(6450,5360) C24.2@6486.54,5360
  other v1: 5630,5210
+1.8VCC: C14.2 C82.2 U22.15 U23.4 | length 367.5
  Top Layer w16: v1(2540,4730) 2552.99,4742.99 U22.15@2552.99,4804.25
  Top Layer w20: C82.2@2380,5390 2430,5440 U23.4@2540,5440 ; v1(2385.12,5315.12) C82.2@2385.12,5380
  Bottom Layer w8: v1(2540,4730) 2540,4764.41 C14.2@2545.59,4770
+2.5VCC: C28.2 C31.2 C62.2 C63.2 C64.2 C65.2 C66.2 C67.2 C68.2 C69.2 C88.2 R8.1 U6.17 U6.38 U6.69 U6.89 U6.121 U6.142 U6.173 U6.188 U6.193 U6.201 U25.4 | length 1436.3
  Top Layer w8: v1(3030,3820) R8.1@3086.54,3820 ; U6.142@3753.62,4793.5 3753.62,4746.38 v1(3770,4730)
  Top Layer w10: U6.201@3386.5,3835.83 v1@3444.17,3835.83 ; U6.193@3386.5,3993.31 3436.69,3993.31 v1(3450,3980) ; U6.188@3386.5,4091.73 3442.91,4091.73 v1(3445.59,4094.41) ; U6.173@3386.5,4387.01 3437.01,4387.01 v1(3460,4410) ; v1(3790,3670) 3792.99,3667.01 U6.17@3792.99,3606.5 ; v1(4167.01,4732.99) U6.121@4167.01,4793.5 ; U6.38@4206.38,3606.5 v1(4206.38,3663.62) ; v1(4490,4450) 4533.31,4406.69 U6.89@4573.5,4406.69 ; v1(4510,4000) 4522.99,4012.99 U6.69@4573.5,4012.99
  Top Layer w16: U25.4@3195,3351 3363.88,3351 C88.2@3374.88,3340
  Bottom Layer w8: C28.2@3390,3832.66 v1(3447.34,3832.66) ; C31.2@3390,4094.41 v1(3445.59,4094.41) ; C64.2@3770,4693.46 v1(3770,4730)
  Bottom Layer w10: v1(3450,3980) 3460,3980 3486.54,3953.46 C62.2@3486.54,3930
  Bottom Layer w16: v1(3460,4410) 3460,4423.46 C63.2@3486.54,4450 ; v1(3790,3670) C69.2@3790,3706.54 ; v1(4167.01,4732.99) 4170,4730 C65.2@4170,4683.46 ; v1(4206.38,3663.62) 4210,3667.24 C68.2@4210,3700 ; C67.2@4463.46,3970 4493.46,4000 v1(4510,4000) ; C66.2@4473.46,4490 4490,4473.46 v1(4490,4450)
+5VCC: C106.1 C108.1 IO.P7 IO.P8 IO.P9 R21.1 R23.2 R24.2 U5.1 U5.8 | length 816.3
  Top Layer w16: U5.1@7104.69,4425 7113.46,4433.78 7113.46,4540 7139.06,4565.59 C108.1@7139.06,4680 ; 7139.06,4590 v1(7180,4590) ; v1(7282.6,4082.6) R23.2@7282.6,4150 ; R24.2@7312.6,4540 7312.6,4467.4 v1(7315.31,4464.69) U5.8@7315.31,4425 ; R21.1@7367.4,3920 v1(7367.4,4007.4)
  Top Layer w20: IO.P7@2047.24,4725 v1(2115,4725) ; IO.P8@2047.24,4775 v1(2115,4775) ; IO.P9@2047.24,4825 v1(2115,4825)
  Bottom Layer w8: v1(7180,4590) 7190,4580 ; 7270,4070 v1(7282.6,4082.6)
ADA0: U1.34 U6.97 | length 1068.2
  Top Layer w10: U6.97@4573.5,4564.17 4674.17,4564.17 4700,4590 5310,4590 5474.88,4754.88 U1.34@5562.68,4754.88
ADA1: U1.33 U6.100 | length 1051.9
  Top Layer w10: U6.100@4573.5,4623.23 5303.23,4623.23 5454.57,4774.57 U1.33@5562.68,4774.57
ADA2: U1.30 U6.101 | length 1068.2
  Top Layer w10: U6.101@4573.5,4642.91 5262.91,4642.91 5453.62,4833.62 U1.30@5562.68,4833.62
ADA3: U1.29 U6.102 | length 1068.2
  Top Layer w10: U6.102@4573.5,4662.6 5252.6,4662.6 5443.31,4853.31 U1.29@5562.68,4853.31
ADA4: U1.26 U6.106 | length 1178.2
  Top Layer w10: U6.106@4462.28,4793.5 4462.28,4842.28 4490,4870 5380,4870 5422.36,4912.36 U1.26@5562.68,4912.36
ADA5: U1.25 U6.107 | length 1212.1
  Top Layer w10: U6.107@4442.6,4793.5 4442.6,4852.6 4480,4890 5370,4890 5412.05,4932.05 U1.25@5562.68,4932.05
ADA6: U1.24 U6.108 | length 1246
  Top Layer w10: U6.108@4422.91,4793.5 4422.91,4862.91 4511.73,4951.73 U1.24@5562.68,4951.73
ADA7: U1.17 U6.109 | length 1334.6
  Top Layer w10: U6.109@4403.23,4793.5 4403.23,4883.23 4609.53,5089.53 U1.17@5562.68,5089.53
ADA8: U1.52 U6.80 | length 1617.4
  Top Layer w10: U6.80@4573.5,4229.53 4839.53,4229.53 4980,4370 5810,4370 5930.79,4490.79 U1.52@5930.79,4642.68
ADA9: U1.51 U6.81 | length 1577.7
  Top Layer w10: U6.81@4573.5,4249.21 4829.21,4249.21 4970,4390 5790,4390 5911.1,4511.1 U1.51@5911.1,4642.68
ADA10: U1.50 U6.85 | length 1513.5
  Top Layer w10: U6.85@4573.5,4327.95 4867.95,4327.95 4960,4420 5780,4420 5891.42,4531.42 U1.50@5891.42,4642.68
ADA11: U1.49 U6.86 | length 1479.6
  Top Layer w10: U6.86@4573.5,4347.64 4857.64,4347.64 4950,4440 5770,4440 5871.73,4541.73 U1.49@5871.73,4642.68
ADA12: U1.46 U6.87 | length 1417.7
  Top Layer w10: U6.87@4573.5,4367.32 4847.32,4367.32 4940,4460 5740,4460 5812.68,4532.68 U1.46@5812.68,4642.68
ADA13: U1.43 U6.90 | length 1347.2
  Top Layer w8: U6.90@4573.5,4426.38 4633.62,4426.38 4650,4410 4683.62,4410 4700,4426.38
  Top Layer w10: 4700,4426.38 4816.38,4426.38 4870,4480 5700,4480 5753.62,4533.62 U1.43@5753.62,4642.68
ADA14: U1.42 U6.93 | length 1277.5
  Top Layer w10: U6.93@4573.5,4485.43 4825.43,4485.43 4840,4500 5680,4500 5733.94,4553.94 U1.42@5733.94,4642.68
ADA15: U1.41 U6.94 | length 1237.8
  Top Layer w10: U6.94@4573.5,4505.12 4795.12,4505.12 4810,4520 5660,4520 5714.25,4574.25 U1.41@5714.25,4642.68
ADB0: U2.34 U6.57 | length 1089.4
  Top Layer w10: U6.57@4573.5,3776.77 5013.23,3776.77 5255.12,3534.88 U2.34@5562.68,3534.88
ADB1: U2.33 U6.58 | length 1089.4
  Top Layer w10: U6.58@4573.5,3796.46 5053.54,3796.46 5295.43,3554.57 U2.33@5562.68,3554.57
ADB2: U2.30 U6.61 | length 1089.4
  Top Layer w10: U6.61@4573.5,3855.51 5104.49,3855.51 5346.38,3613.62 U2.30@5562.68,3613.62
ADB3: U2.29 U6.62 | length 1089.4
  Top Layer w10: U6.62@4573.5,3875.2 5144.8,3875.2 5386.69,3633.31 U2.29@5562.68,3633.31
ADB4: U2.26 U6.63 | length 1073.1
  Top Layer w10: U6.63@4573.5,3894.88 5165.12,3894.88 5367.64,3692.36 U2.26@5562.68,3692.36
ADB5: U2.25 U6.64 | length 1073.1
  Top Layer w10: U6.64@4573.5,3914.57 5185.43,3914.57 5387.95,3712.05 U2.25@5562.68,3712.05
ADB6: U2.24 U6.65 | length 1073.1
  Top Layer w10: U6.65@4573.5,3934.25 5215.75,3934.25 5418.27,3731.73 U2.24@5562.68,3731.73
ADB7: U2.17 U6.67 | length 1032.3
  Top Layer w10: U6.67@4573.5,3973.62 5276.38,3973.62 5380.47,3869.53 U2.17@5562.68,3869.53
ADB8: U2.52 U6.40 | length 2198
  Top Layer w10: U6.40@4245.75,3606.5 4245.75,3364.25 4450,3160 5800,3160 5930.79,3290.79 U2.52@5930.79,3422.68
ADB9: U2.51 U6.42 | length 2115.9
  Top Layer w10: U6.42@4285.12,3606.5 4285.12,3364.88 4470,3180 5790,3180 5911.1,3301.1 U2.51@5911.1,3422.68
ADB10: U2.50 U6.43 | length 2036.2
  Top Layer w10: U6.43@4304.8,3606.5 4304.8,3395.2 4500,3200 5780,3200 5891.42,3311.42 U2.50@5891.42,3422.68
ADB11: U2.49 U6.44 | length 1950.6
  Top Layer w10: U6.44@4324.49,3606.5 4324.49,3415.51 4520,3220 5750,3220 5871.73,3341.73 U2.49@5871.73,3422.68
ADB12: U2.46 U6.45 | length 1841.4
  Top Layer w10: U6.45@4344.17,3606.5 4344.17,3425.83 4500,3270 5770,3270 5812.68,3312.68 U2.46@5812.68,3422.68
ADB13: U2.43 U6.46 | length 1727.8
  Top Layer w10: U6.46@4363.86,3606.5 4363.86,3436.14 4510,3290 5710,3290 5753.62,3333.62 U2.43@5753.62,3422.68
ADB14: U2.42 U6.48 | length 1631.6
  Top Layer w10: U6.48@4403.23,3606.5 4403.23,3446.77 4530,3320 5710,3320 5733.94,3343.94 U2.42@5733.94,3422.68
ADB15: U2.41 U6.50 | length 1549.6
  Top Layer w10: U6.50@4442.6,3606.5 4442.6,3447.4 4550,3340 5700,3340 5714.25,3354.25 U2.41@5714.25,3422.68
DSP0RX+: IO.6 U6.190 | length 1369.3
  Top Layer w10: 3327.64,4052.36 U6.190@3386.5,4052.36
  Top Layer w16: IO.6@2047.24,4125 2175,4125 2240,4060 3320,4060 3327.64,4052.36
DSP0RX-: IO.5 U6.191 | length 1351.7
  Top Layer w8: 3310,4030 U6.191@3380,4030
  Top Layer w16: IO.5@2047.24,4075 2175,4075 2224,4028 3310,4028
DSP0TX+: IO.2 U6.194 | length 1371.8
  Top Layer w10: v1(3316.38,3970) 3320,3973.62 U6.194@3386.5,3973.62
  Top Layer w16: IO.2@2047.24,3925 2090,3925 2105,3940 3250,3940 v1(3265,3925)
  Bottom Layer w10: v1(3265,3925) 3310,3970 v1(3316.38,3970)
DSP0TX-: IO.3 U6.196 | length 1356.1
  Top Layer w10: v1(3270,3970) 3274.25,3970 3310,3934.25 U6.196@3386.5,3934.25
  Top Layer w16: IO.3@2047.24,3975 3265,3975 v1(3270,3970)
EXTLED0: R26.1 U6.123 | length 4831.9
  Top Layer w8: U6.123@4127.64,4793.5 4127.64,4867.64 4180,4920 4180,4990 3970,5200 3970,5870 4030,5930 6880,5930 7222.6,5587.4 R26.1@7222.6,5360
EXTLED1: R25.1 U6.124 | length 4410.3
  Top Layer w8: v1(4080,5050) 4080,5040 4150,4970 4150,4911.21 4107.95,4869.17 U6.124@4107.95,4793.5 ; v1(4130,5090) 4320,5280 4920,5280 5220,5580 5640,5580 5700,5640 5700,5710 5860,5870 6830,5870 7130,5570 7130,5162.6 R25.1@7232.6,5060
  Bottom Layer w8: v1(4080,5050) 4120,5090 v1(4130,5090)
FLAGA0: U1.15 U6.113 | length 1477.3
  Top Layer w10: U6.113@4324.49,4793.5 4324.49,4964.49 4488.9,5128.9 U1.15@5562.68,5128.9
FLAGA1: U1.16 U6.111 | length 1382.5
  Top Layer w10: U6.111@4363.86,4793.5 4363.86,4883.86 4589.21,5109.21 U1.16@5562.68,5109.21
FLAGA2: U1.97 U6.115 | length 2589
  Top Layer w10: v1(4280,4870) 4285.12,4864.88 U6.115@4285.12,4793.5 ; v1(5660,4870) 5850,4870 6020,5040 v1(6280,5040) ; U1.97@6397.32,5187.95 6459.31,5187.95 v1(6520,5127.27)
  Bottom Layer w8: v1(4280,4870) 4299.31,4850.69 5640.69,4850.69 v1(5660,4870) ; v1(6280,5040) 6310,5070 6380,5070 6420,5110 6502.73,5110 v1(6520,5127.27)
FLAGA3: U1.98 U6.114 | length 2600.4
  Top Layer w10: U6.114@4304.8,4793.5 4304.8,4974.8 4480,5150 5420,5150 v1(5470,5200) ; v1(5660,5100) 6130,5100 6190,5160 v1(6290,5160) ; U1.98@6397.32,5207.64 6467.64,5207.64 v1(6470,5210)
  Bottom Layer w10: v1(5470,5200) 5510,5200 5610,5100 v1(5660,5100) ; v1(6290,5160) 6420,5160 v1(6470,5210)
FLAGB0: U2.15 U6.74 | length 1079.9
  Top Layer w10: U6.74@4573.5,4111.42 5268.58,4111.42 5470,3910 U2.15@5570,3910
FLAGB1: U2.16 U6.72 | length 1064.9
  Top Layer w10: U6.72@4573.5,4072.05 5267.95,4072.05 5450.79,3889.21 U2.16@5562.68,3889.21
FLAGB2: U2.97 U6.71 | length 1959.2
  Top Layer w8: U6.71@4573.5,4052.36 4697.64,4052.36 4720,4030 v1(5220,4030) ; v1(5870,4030) 5932.05,3967.95 U2.97@6397.32,3967.95
  Bottom Layer w8: v1(5220,4030) 5290,4100 5540,4100 5560,4080 5560,4050 5610,4000 5810,4000 5840,4030 v1(5870,4030)
FLAGB3: U2.98 U6.68 | length 1926.6
  Top Layer w8: U6.68@4573.5,3993.31 5233.31,3993.31 v1(5270,4030) ; v1(5940,4000) 5952.36,3987.64 U2.98@6397.32,3987.64
  Bottom Layer w8: v1(5270,4030) 5320,4030 5370.21,4080.21 5510,4080.21 5539.79,4050.41 5539.79,4030.21 5590,3980 5900,3980 5920,4000 v1(5940,4000)